# EAGLE board radio_module (EAGLE 6.6.0)
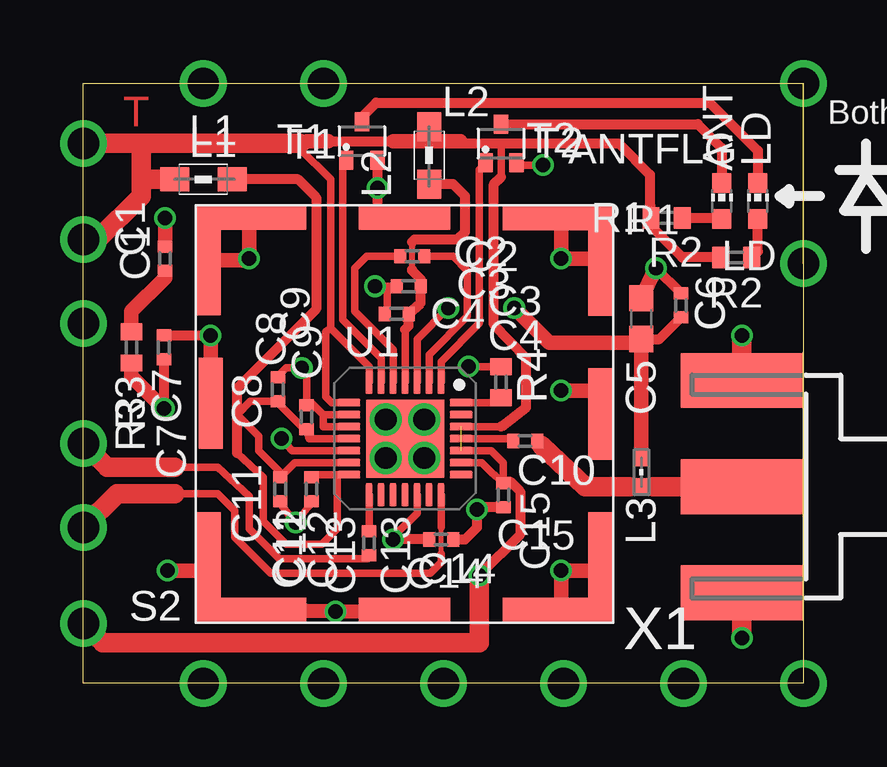
[diagram p0: board, top side]
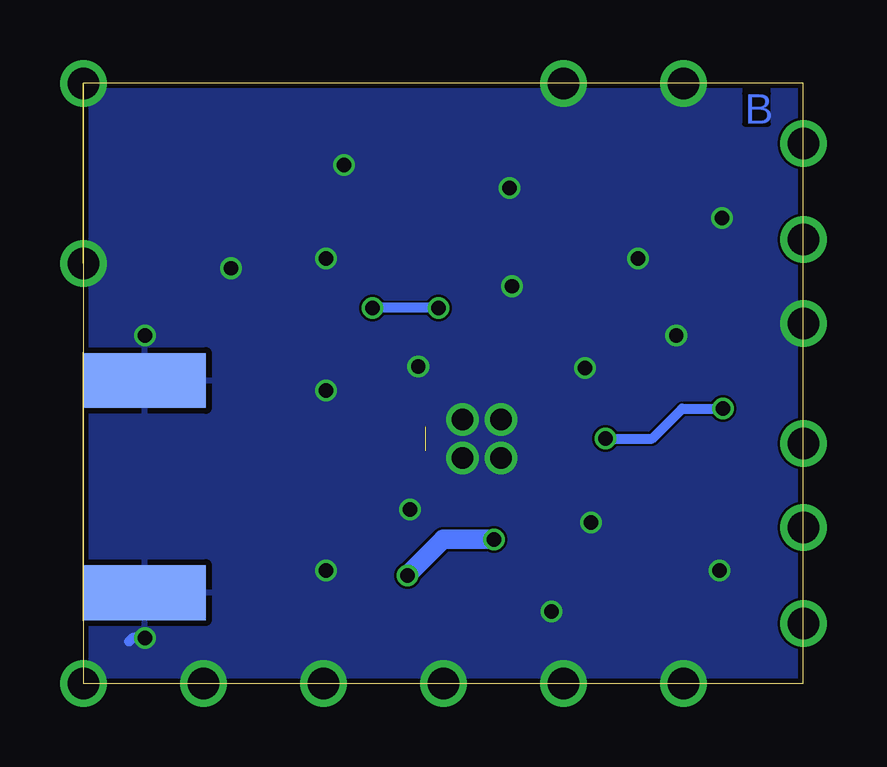
[diagram p1: board, bottom side, seen from below]

Size 30 x 25 mm. Coordinates in mm from the lower left corner, seen from the top.
Outline: 0,25 30,25 30,0 0,0 0,25
Copper layers ((1+2)*(3+14)*(15+16)): Top 0.035mm / dielectric 0.2mm / layer 2 0.035mm / dielectric 0.2mm / layer 3 0.035mm / dielectric 0.2mm / layer 14 0.035mm / dielectric 0.2mm / layer 15 0.035mm / dielectric 0.2mm / Bottom 0.035mm
Design rules "4mil-2lyr": minimum track width 4mil, minimum drill 0.2mm, track to track 4mil, track to pad 4mil, pad to pad 4mil, via to via 4mil, smd to smd 0mil, copper to edge 8mil, drill to drill 8mil, minimum pad ring 4mil, minimum via ring 0.0953mm, stop-mask expansion 1mil, vias tented up to drill 0.5mm, thermal gap 10mil

## Footprints (pad centres in the part's own frame; a part is rotated, then mirrored left to right if it is on the bottom)
CHIP-LED0603 = smd 0.8 x 0.8: A 0,-0.75; C 0,0.75
C0402 = smd 0.5 x 0.6: 1 -0.5,0; 2 0.5,0
C0603 = smd 1.1 x 1: 1 -0.85,0; 2 0.85,0
0805 = smd 1.2 x 1: 1 -1.2,0; 2 1.2,0
0402 = smd 0.7 x 0.6: 1 -0.6,0; 2 0.6,0
R0402 = smd 0.7 x 0.9: 1 -0.65,0; 2 0.65,0
BMIS-202 = smd 1 x 4.55: P$1 -7.675,-6.35; P$2 -7.675,6.425; P$3 8.625,6.4; P$4 8.625,-6.35 | smd 1 x 3.8: P$5 -7.6,0.475; P$7 8.625,0.025 | smd 3.8 x 1: P$6 0.475,8.2; P$8 0.475,-8.125 | smd 3.55 x 1: P$9 -5.4,-8.125; P$10 -5.4,8.2; P$11 6.35,8.175; P$12 6.35,-8.125
SOT323-R_INFINEON = smd 0.6 x 0.8: 1 -0.65,-0.8; 2 0.65,-0.8; 3 0,0.8
QFN28LPKF = smd 0.95 x 0.3: 1 -2.34,1.5; 2 -2.34,1; 3 -2.34,0.5; 4 -2.34,0; 5 -2.34,-0.5; 6 -2.34,-1; 7 -2.34,-1.5; 15 2.34,-1.5; 16 2.34,-1; 17 2.34,-0.5; 18 2.34,0; 19 2.34,0.5; 20 2.34,1; 21 2.34,1.5 | smd 0.3 x 0.95: 8 -1.5,-2.34; 9 -1,-2.34; 10 -0.5,-2.34; 11 0,-2.34; 12 0.5,-2.34; 13 1,-2.34; 14 1.5,-2.34; 22 1.5,2.34; 23 1,2.34; 24 0.5,2.34; 25 0,2.34; 26 -0.5,2.34; 27 -1,2.34; 28 -1.5,2.34 | smd 3.25 x 3.25: M 0,0 | drill 0.9: P$4 0.8,0.8; P$6 -0.8,0.8; P$7 -0.8,-0.8; P$9 0.8,-0.8
J502-ND-142-0701-801/806 = smd 5.08 x 2.286: 1 2.565,0; G@1 2.565,4.42; G@2 2.565,-4.42 | smd 5.08 x 2.286 bottom: G@3 2.565,4.42; G@4 2.565,-4.42

## Placement (x,y rotation side)
ANTFLG  RED  [CHIP-LED0603]  26.6,20.1 0 top
C1  0.47n  [C0402]  3.4,17.7 270 top
C2  0.47n  [C0402]  13.7,17.8 0 top
C3  0.1  [C0402]  13.55,16.55 180 top
C4  100p  [C0402]  13.05,15.4 180 top
C5  0.1  [C0603]  23.25,15.2 90 top
C6  100p  [C0402]  24.9,15.75 90 top
C7  27p  [C0402]  3.35,14 270 top
C8  0.1  [C0402]  8.1,12.25 90 top
C9  100p  [C0402]  9.3,11.1 90 top
C10  4n7  [C0402]  18.4,10.1 180 top
C11  0.1  [C0402]  8.2,8.1 270 top
C12  0.1  [C0402]  9.5,8.1 270 top
C13  10n  [C0402]  11.9,5.85 90 top
C14  0.1  [C0402]  14.9,6 0 top
C15  0.1  [C0402]  17.5,7.85 270 top
L1  WE-CBF_0805  [0805]  5,21 180 top
L2  WE-CBF_0805  [0805]  14.4,22 90 top
L3  LQG15HS27NJ02  [0402]  23.25,8.8 270 top
LD  RED  [CHIP-LED0603]  28.1,20.1 0 top
R1  1K  [R0402]  24.3,19.4 180 top
R2  1K  [R0402]  27.2,17.75 180 top
R3  20k  [R0402]  2,14 90 top
R4  100k  [R0402]  17.4,12.55 270 top
S2  BMIS-202  [BMIS-202]  12.9,11.2 0 top
T1  DDTC114  [SOT323-R_INFINEON]  11.6,22.6 0 top
T2  DDTC114  [SOT323-R_INFINEON]  17.4,22.5 0 top
U1  MAX2769LPKF  [QFN28LPKF]  13.4,10.2 270 top
X1  SMA  [J502-ND-142-0701-801/806]  30,8.2 180 top

## Library data of the parts
ANTFLG LD = led
C1-C4 C6-C15 = rcl_1
C5 R1-R4 = rcl
L1 L2 = EagleLibrary_Wuerth_Elektronik_eiSos_Version_6-9
L3 = wuerth_elektronik_eisos__v6.12
S2 = laird
T1 T2 = digital-transistors-2
U1 = maxim1
X1 = con-coax; MF: JOHNSON COMPONENTS; MPN: 142-0701-801; OC_FARNELL: 1608592; OC_NEWARK: 90F2624

## Nets
+UB: C3.1 C4.1 L2.1 U1.4
ANTFLG: T2.1 U1.1
CKIN: C13.1
DT_SIGN: U1.21
GNDA: C1.1 C3.2 C4.2 C5.2 C6.2 C7.1 C8.2 C9.2 C11.2 C12.2 C14.2 C15.2 R4.1 S2.P$1 S2.P$2 S2.P$3 S2.P$4 S2.P$5 S2.P$6 S2.P$7 S2.P$8 S2.P$9 S2.P$10 S2.P$11 S2.P$12 T1.2 T2.2 U1.9 U1.10 U1.M U1.P$4 U1.P$6 U1.P$7 U1.P$9 X1.G@1 X1.G@2 X1.G@3 X1.G@4
LD: T1.1 U1.6
LNA2: C10.2 U1.25
LNAOUT: C2.2 U1.2
MIXIN: C2.1 U1.5
N$1: C7.2 R3.1 U1.12
N$3: C1.2 R3.2
N$5: C5.1 C6.1 L3.1 U1.3
N$7: ANTFLG.A R1.1
N$8: ANTFLG.C T2.3
N$16: LD.A R2.1
N$17: LD.C T1.3
N$18: R4.2 U1.28
N$33: C10.1 L3.2 X1.1
V+: C8.1 C9.1 C11.1 C12.1 L1.1 U1.11 U1.13 U1.14
VCC/2: C14.1 C15.1 L1.2 L2.2 R1.2 R2.2 U1.7 U1.8 U1.19 U1.23 U1.24 U1.26
XTAL: C13.2 U1.15

## Tracks (layer width: path | path; a pad name or v marks a point on that pad's centre or on a via)
+UB
  Top 0.254: 13.55,15.5 C4.1 | 13.7,17.25 13.7,18.3
  Top 0.305: U1.4 13.4,14.75 | 13.7,18.3 13.7,18.4
  Top 0.406: 13.4,14.75 13.55,14.9 13.55,15.5 | C4.1 14.05,15.85 C3.1 14.05,16.85 13.7,17.2 13.7,17.25 | 13.7,18.4 13.8,18.5 15.6,18.5 15.9,18.8 15.9,20.3 15.4,20.8 L2.1
ANTFLG
  Top 0.305: U1.1 14.9,13.4 16.5,15 16.5,21.4 16.68,21.6 16.75,21.64 T2.1
CKIN  (via drill 1.3 pad 1.93)
  Top 0.305: 3.8,9 5.6,9 6.9,7.8 6.9,6.45 8.15,5.2 11.85,5.2 C13.1
  Top 0.813: v0,10 1,9 3.8,9
DT_SIGN  (via drill 1.3 pad 1.93)
  Top 0.2: 14.9,5.4 14.9,6.5
  Top 0.305: 3.8,7.9 5.6,7.9 6.3,7.2 6.3,6.1 7.8,4.6 14.45,4.6 14.9,5.05 14.9,5.4 | U1.21 14.9,6.5
  Top 0.813: v0,6.5 1.4,7.9 3.8,7.9
GNDA  (via drill 0.6, 1.3 pad 1.93)  (1 unrouted)
  Top 0.2: 12.6,16.55 12.65,16.5
  Top 0.254: S2.P$8 12.5,2.98 13,3.1 | 9.5,11.7 C9.2 | C4.2 12.65,15.7 | U1.M 12.18,11.25 U1.P$7
  Top 0.305: U1.10 10,10.7 10,11.2 | C9.2 9.3,13.05 v9.1,13.15 8.45,13.15 8.1,12.8 C8.2 | U1.9 10,11.2 | 10,11.2 9.5,11.7 | 12.65,15.7 12.65,16.5 12.55,16.55 v12.15,16.55 | R4.1 17.4,13.1 | 17.4,13 17.4,13.1 | 17.4,13.1 17.3,13.2 v16.05,13.2 | S2.P$6 13.4,19.4 | C11.2 8.2,7.5 8.8,6.7 v8.85,6.7 9.4,7.4 C12.2 | T2.2 18.05,21.6 19,21.6 19.2,21.4 v19.15,21.6 | C3.2 12.6,16.55
  Top 0.406: C15.2 16.5,7.35 v16.4,7.25 16.4,6.5 15.9,6 C14.2 | T1.2 v12.25,20.65 12.25,19.4 S2.P$6 | 23.25,16.25 C5.2 | C7.1 v5.3,14.5 | C1.1 3.4,18.5 | C6.2 v23.85,17.3
  Top 0.61: S2.P$12 19.9,3.05 v19.9,4.7 21.55,4.7 S2.P$4 | S2.P$1 5.22,4.7 v3.5,4.7 | S2.P$9 6.9,3.08 v10.5,3 12.5,2.98 | S2.P$2 6.9,17.62 v6.9,17.7 6.9,19.2 7.5,19.2 S2.P$10 | S2.P$3 21.4,16.6 21.4,17.7 v19.9,17.7 19.9,19.38 S2.P$11 | S2.P$5 v5.3,14.5 | v19.9,12.2 21.52,12.2 S2.P$7 | v23.85,17.3 C5.2 | 3.4,18.5 v3.4,19.4
  Top 0.813: X1.G@3 v27.43,1.9 | X1.G@4 v27.43,14.5
  Bottom 0.406: v27.43,1.9 27.95,1.9 28.1,1.75 | v30,0 29.55,0.45
  other vias: 5,0 15,0 20,0 25,0 10,0 0,15 5,25 10,25 30,25 30,17.5
  pour Bottom: 0,0 30,0 30,25 0,25
LD
  Top 0.305: U1.6 12.4,13.55 10.8,15.15 10.8,21.55 T1.1
LNA2
  Top 0.305: U1.25 17.7,10.2 17.9,10 C10.2
LNAOUT
  Top 0.305: C2.2 15.4,17.8 16,17.2 16,15.3 14.4,13.7 U1.2
MIXIN
  Top 0.305: U1.5 12.9,13.9 11.3,15.5 11.3,17.3 11.8,17.8 C2.1
N$1  (via drill 0.6)
  Top 0.305: U1.12 8.7,9.7 v8.25,10.2
  Top 0.406: C7.2 v3.35,11.45
  Top 0.61: R3.1 2,12.8 v3.35,11.45
  Bottom 0.406: v8.25,10.2 6.3,10.2 5.05,11.45 v3.35,11.45
N$3
  Top 0.406: C1.2 3.4,17
  Top 0.61: R3.2 2,15.5 3.4,16.9 3.4,17
N$5  (via drill 0.6)
  Top 0.254: C5.1 23.15,14.2
  Top 0.305: U1.3 13.9,14.35 v15.2,15.65
  Top 0.406: L3.1 23.25,9.75 | C5.1 24,14.35 C6.1
  Top 0.61: v17.95,15.65 19.4,14.2 23.15,14.2 | 23.25,9.75 C5.1
  Bottom 0.406: v15.2,15.65 v17.95,15.65
N$7
  Top 0.406: R1.1 26.55,19.4 ANTFLG.A
N$8
  Top 0.406: T2.3 25.6,23.3 26.6,22.3 ANTFLG.C
N$16
  Top 0.406: R2.1 28.1,18 LD.A
N$17
  Top 0.406: 11.6,23.2 T1.3 11.6,23.6 12.2,24.2 26.1,24.2 28.1,22.2 LD.C
N$18
  Top 0.305: R4.2 17.4,11.7 U1.28
N$33
  Top 0.305: 27.9,8.2 X1.1
  Top 0.406: 19.1,9.9 C10.1 | 22.75,8.2 L3.2 23.75,8.2
  Top 0.813: 19.1,9.9 20.9,8.2 22.75,8.2 | 23.75,8.2 X1.1
V+
  Top 0.254: C9.1 9.4,10.35
  Top 0.305: C9.1 9.4,10.2 U1.11 | 9.4,10.35 9.25,10.55 8.2,11.6 C8.1 6.95,11.75 6.4,11.2 7.3,10.3 7.3,9.7 8.3,8.7 C11.1 8.8,9.2 U1.13 | 9.5,8.57 C12.1 9.7,8.7 10.57,8.7 | 6.4,9.6 7.5,8.6 7.5,6.75 8.45,5.8 9.93,5.8 10.57,6.45 10.57,8.7 | U1.14 10.57,8.7
  Top 0.406: 6.4,9.6 6.4,11.2 6.4,12.3 9.7,15.6 9.7,20.25 8.95,21 L1.1
VCC/2  (via drill 0.6, 1.3 pad 1.93)  (1 unrouted)
  Top 0.305: U1.7 11.9,13.2 10.3,14.8 | U1.26 17.4,10.7 | U1.8 10.35,11.7 10.1,11.95 10.1,14.65 10.3,14.8 | U1.24 17,9.7 17.5,9.2 C15.1 17.45,8.4 17,8.8 16.6,9.2 U1.23 | 17.4,22.5 17.4,21.1 | 10.3,14.8 10.3,20.7 10.3,21 9,22.3 8.55,22.5 | 13.9,6 C14.1 | U1.19 13.9,7.1 13,6.2 13,6
  Top 0.406: 17.4,10.7 18.45,11.5 18.45,13.55 17.1,14.95 17.1,20.8 17.4,21.1 | C15.1 17.55,8.4 17.8,8.4 18.2,8 18.2,6.2 v16.5,4.5 | R2.2 26.45,17.75 24.95,17.75 23.7,19 23.7,19.35 R1.2 23.6,20.05 23.6,21.2 22.3,22.5 17.4,22.5 15.8,22.5 15.7,22.6 | C14.1 13,6 v12.9,6 | 10.2,22.6 12.9,22.6 | L2.2 13.8,22.6 13.7,22.6
  Top 0.61: 9,22.5 9.1,22.6 9.2,22.5 9.3,22.6 10.2,22.6 | 12.9,22.6 13.7,22.6 15.7,22.6
  Top 0.813: 2.4,21 2.4,22.5 | 2.4,22.5 8.55,22.5 9,22.5 | L1.2 2.4,21 | v16.5,4.5 16.5,1.7 0.8,1.7 v0,2.5 | v0,22.5 0.2,22.5 2.4,22.5 | v0,18.5 0.6,18.5 2.4,20.3 2.4,21
  Bottom 0.813: v12.9,6 15,6 v16.5,4.5
XTAL
  Top 0.305: U1.15 C13.2

## Text on the board
Top: T
Bottom: B
_tsilk: ANT | L2 | LD | L1 | Both: | T1 | T2 | R1 | C1 | R2 | C2 | C3 | C4 | C6 | U1 | R4 | C7 | C8 | C9 | C5 | R3 | C10 | L3 | C11 | C12 | C15 | C13 | C14 | S2 | X1
_bsilk: Radio_board V1.00 | (c) 2014